# EAGLE board PIR_MOC (EAGLE 6.5.0)

Size 39.37 x 29.2 mm. Coordinates in mm from the lower left corner, seen from the top.
Outline: 0,0 39.37,0 39.37,29.2 0,29.2 0,0
Copper layers (1*16): Top 0.035mm / dielectric 1.5mm / Bottom 0.035mm
Design rules "default": minimum track width 10mil, minimum drill 24mil, track to track 8mil, track to pad 8mil, pad to pad 8mil, via to via 8mil, smd to smd 8mil, copper to edge 40mil, drill to drill 8mil, minimum pad ring 10mil, minimum via ring 8mil, stop-mask expansion 4mil, vias tented up to drill 0mil, thermal gap 10mil

## Footprints (pad centres in the part's own frame; a part is rotated, then mirrored left to right if it is on the bottom)
2,8-PAD-SQUARE = drill 2.8 pad 5.842 square: B2,8 0,0
DIL6-SMD = smd 1.78 x 1.52: 1 -2.54,-4.645; 2 0,-4.645; 3 2.54,-4.645; 4 2.54,4.645; 5 0,4.645; 6 -2.54,4.645
1X03-S = drill 1.016 square: 1 -2.54,0 | drill 1.016 octagon: 2 0,0; 3 2.54,0
R1206 = smd 1.3 x 1.6: 1 -1.524,0; 2 1.524,0
TO263 = smd 1 x 3.4: 1 -2.54,-6.6; 2 2.54,-6.6 | smd 6.8 x 9.6: 3 0,3.5
SO-8 = smd 1.524 x 0.61: 1 -2.743,1.905; 2 -2.743,0.635; 3 -2.743,-0.635; 4 -2.743,-1.905; 5 2.743,-1.905; 6 2.743,-0.635; 7 2.743,0.635; 8 2.743,1.905

## Placement (x,y rotation side)
H1  MOUNT-PAD-SQUARE2.8  [2,8-PAD-SQUARE]  34.29,24.13 0 top
H2  MOUNT-PAD-SQUARE2.8  [2,8-PAD-SQUARE]  34.29,5.08 0 top
H3  MOUNT-HOLE  [CASE_20-31_VHOLES]  19.71,15.47 0 top
OK1  MOC3043S  [DIL6-SMD]  10.16,6.35 270 top
PIR  [1X03-S]  3.81,22.86 90 top
R1  680  [R1206]  5.79,14.25 270 top
R2  360  [R1206]  15.24,13.97 90 top
R3  360  [R1206]  22.86,3.81 0 top
R4  10k  [R1206]  10.54,26.57 180 top
T1  BT136-D2PACK  [TO263]  22.86,16.51 0 top
U$1  IRF7403  [SO-8]  10.49,20.27 270 top

## Library data of the parts
H1 H2 = holes
H3 T1 U$1 = my-library
OK1 = optocoupler; MF: FAIRCHILD SEMICONDUCTOR; MPN: MOC3063SM; OC_FARNELL: 1505441; OC_NEWARK: 78K6091
PIR = pinhead-2
R1-R4 = rc-master-smd

## Nets
220_AC: H1.B2,8 R2.2 T1.3
220_MOC_AC: OK1.6 R2.1
220_MOC_N: OK1.4 R3.1 T1.2
220_N: H2.B2,8 R3.2 T1.1
+12V: PIR.1 R1.1
GND: PIR.3 R4.1 U$1.1 U$1.2 U$1.3
N$5: OK1.2 U$1.5 U$1.6 U$1.7 U$1.8
N$6: OK1.1 R1.2
N$7: PIR.2 R4.2 U$1.4

## Tracks (layer width: path | path; a pad name or v marks a point on that pad's centre or on a via)
220_AC  (2 unrouted)
220_MOC_AC  (1 unrouted)
220_MOC_N  (2 unrouted)
220_N  (2 unrouted)
+12V  (1 unrouted)
GND  (4 unrouted)
N$5  (4 unrouted)
N$6  (1 unrouted)
N$7  (2 unrouted)